# Altium PCB PCB_BoargV1.PcbDoc
Units mm, origin at the board's own origin, x right, y up, seen from the top; angles counter-clockwise.
Board outline 70.99 x 43.56 mm, 2 copper layers (Top Layer, Bottom Layer); 40 components, 55 nets, 199 pads, 16 vias.
Unrouted connection lines stored in the file: 39.
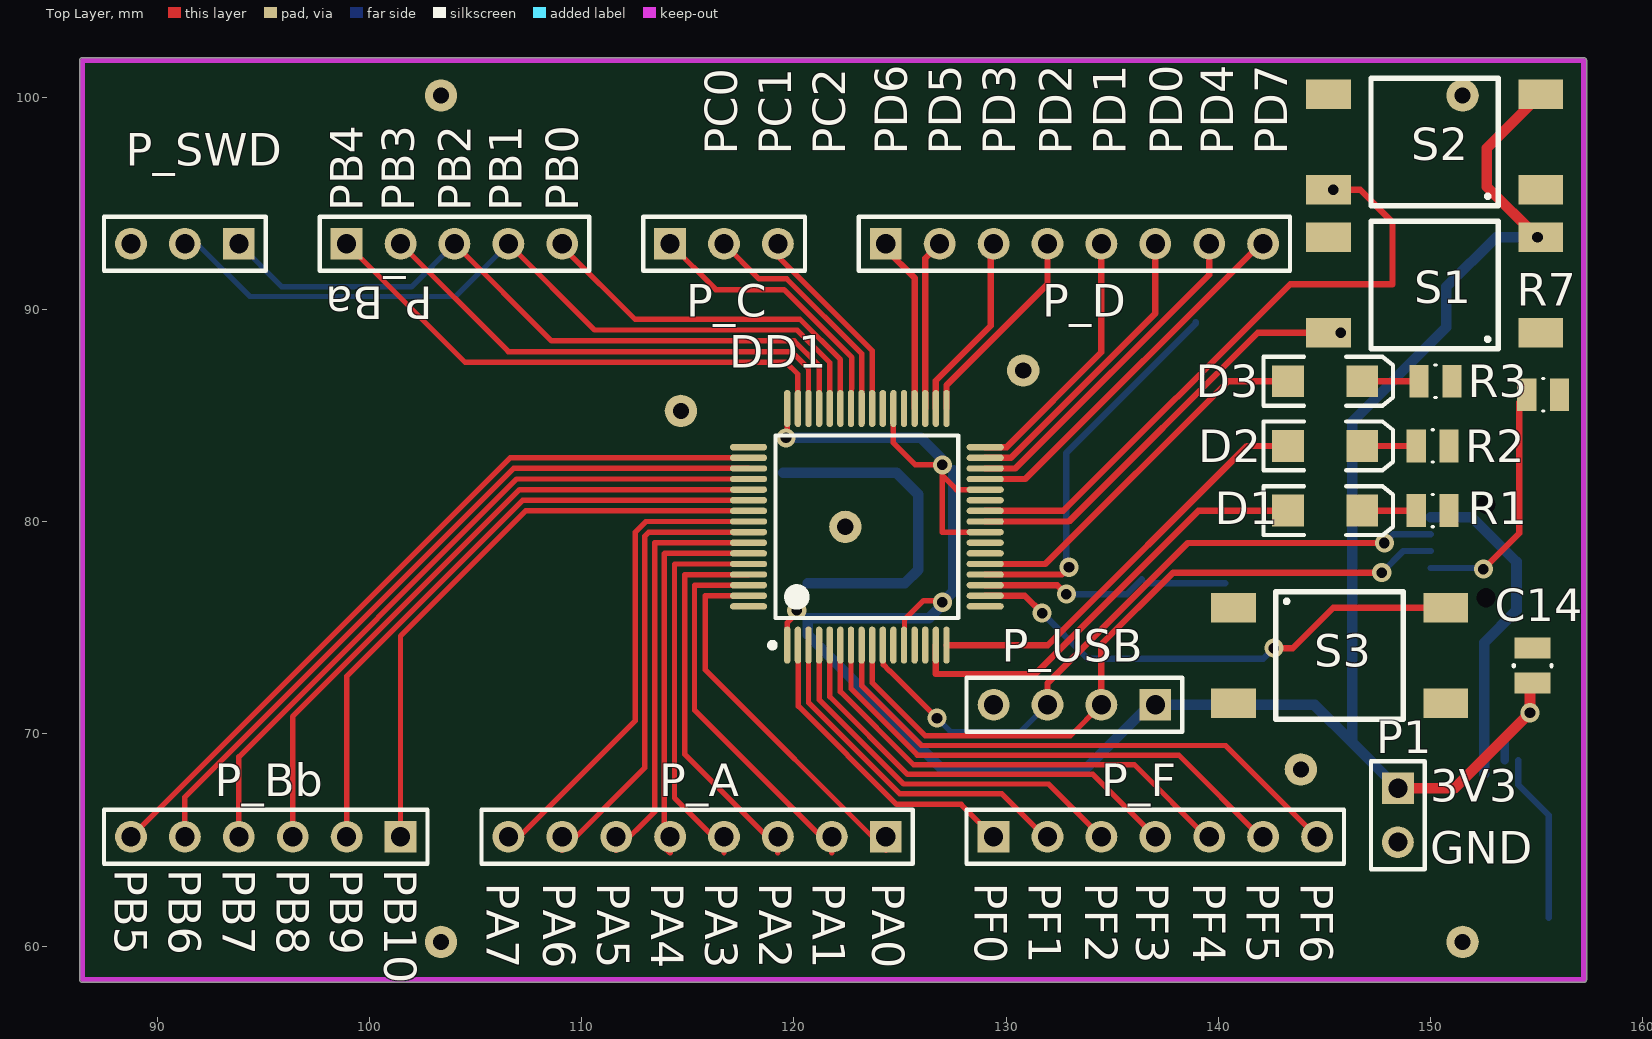
[diagram p0: Top Layer view]
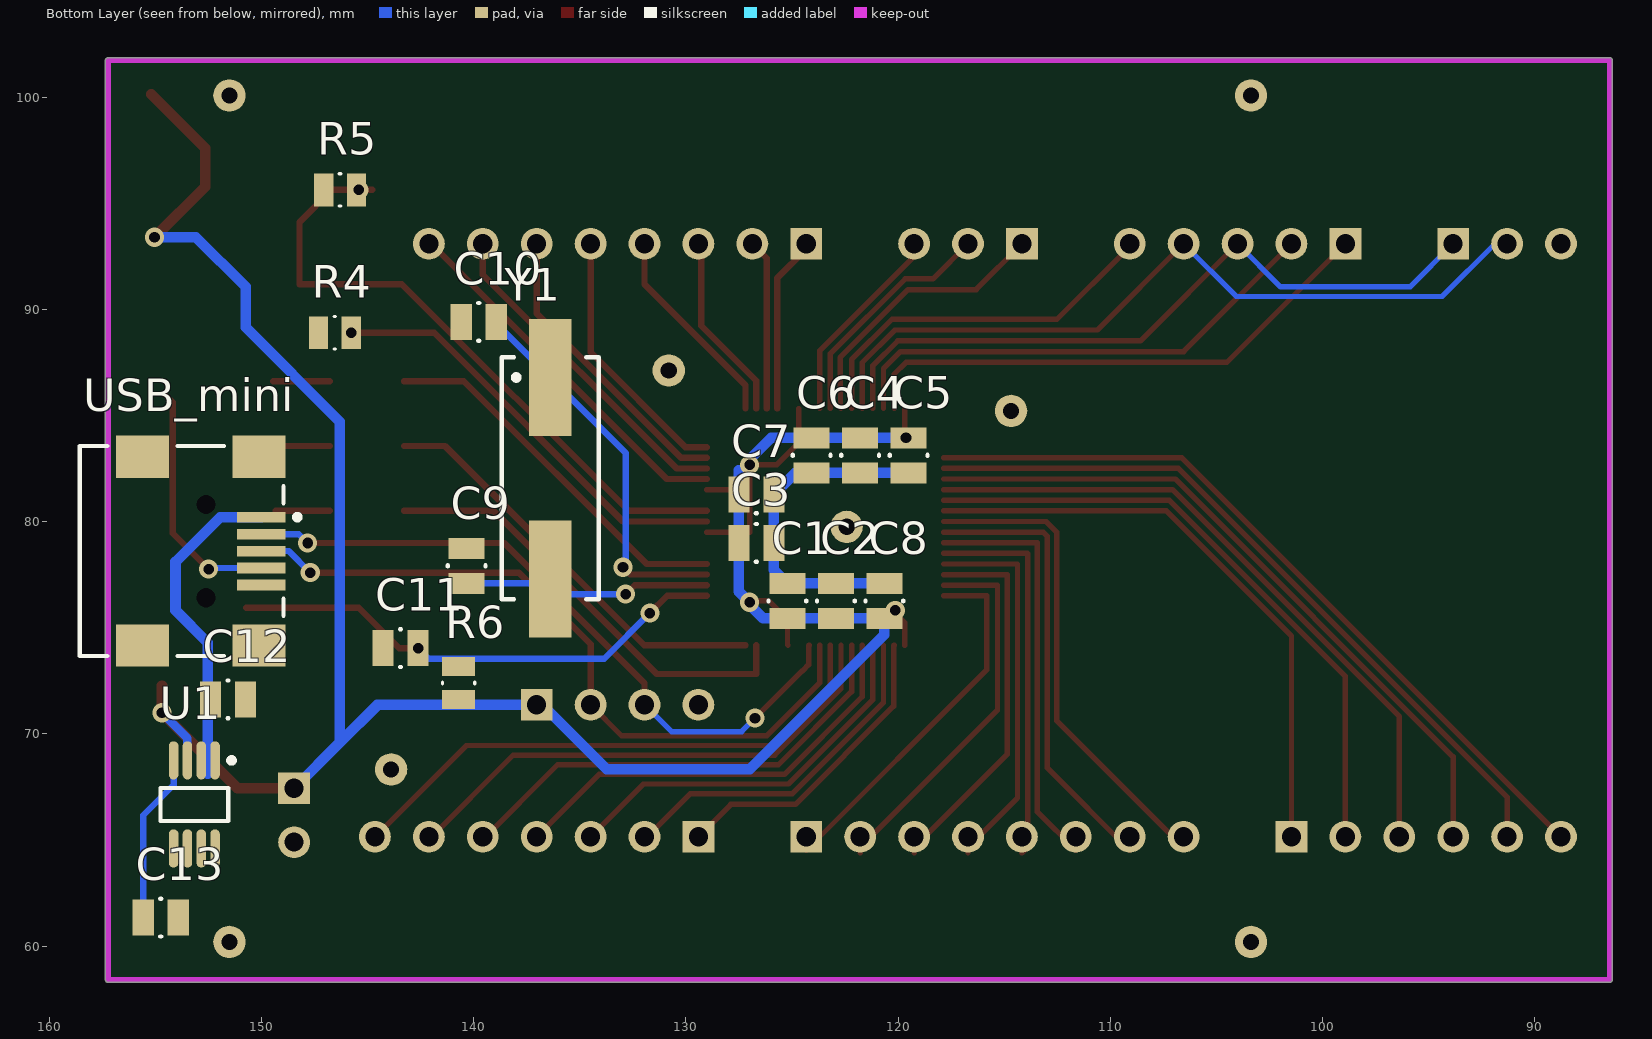
[diagram p1: Bottom Layer view, seen from below]
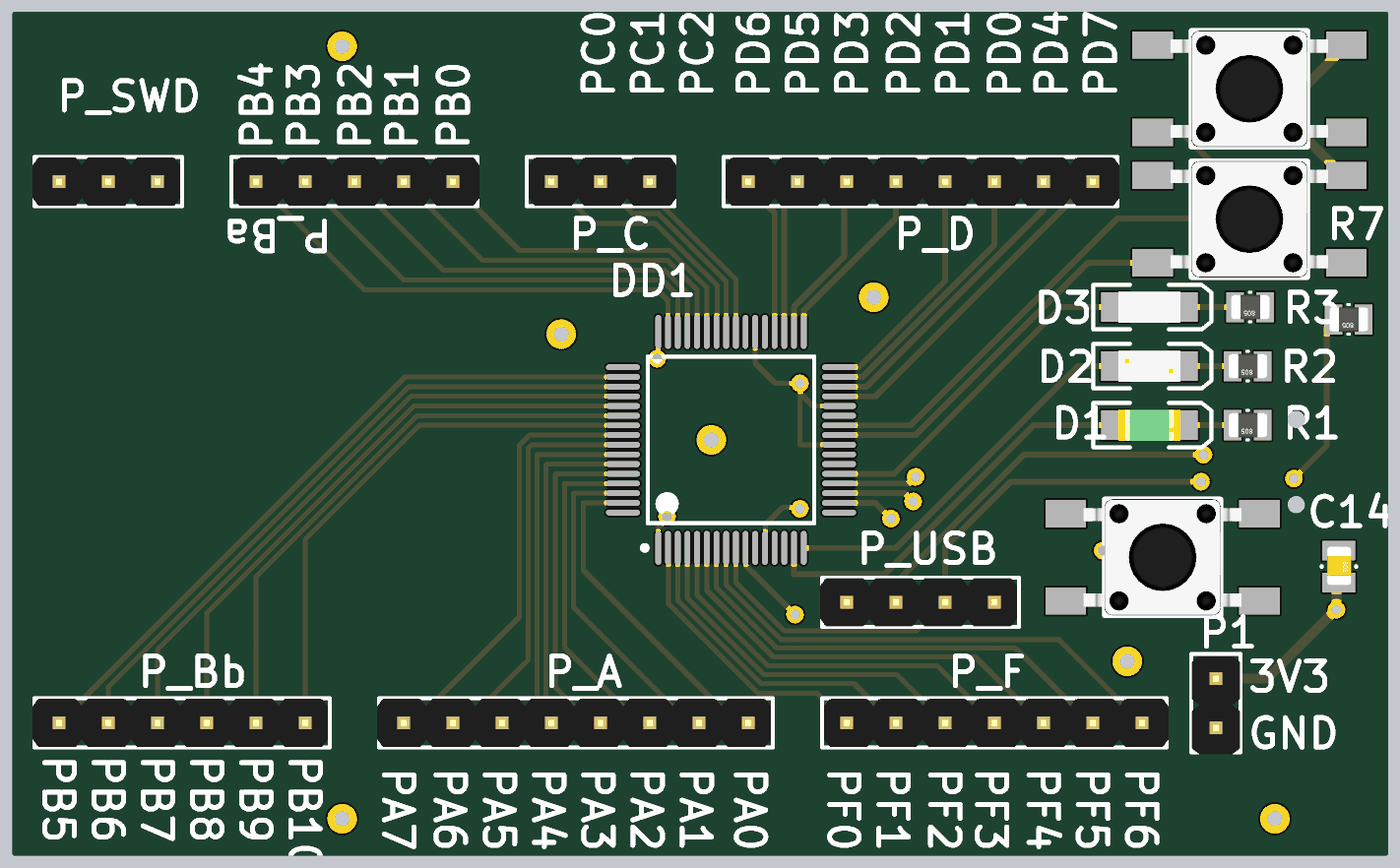
[diagram p2: 3D render of the assembled board from above, using the file's embedded part models]
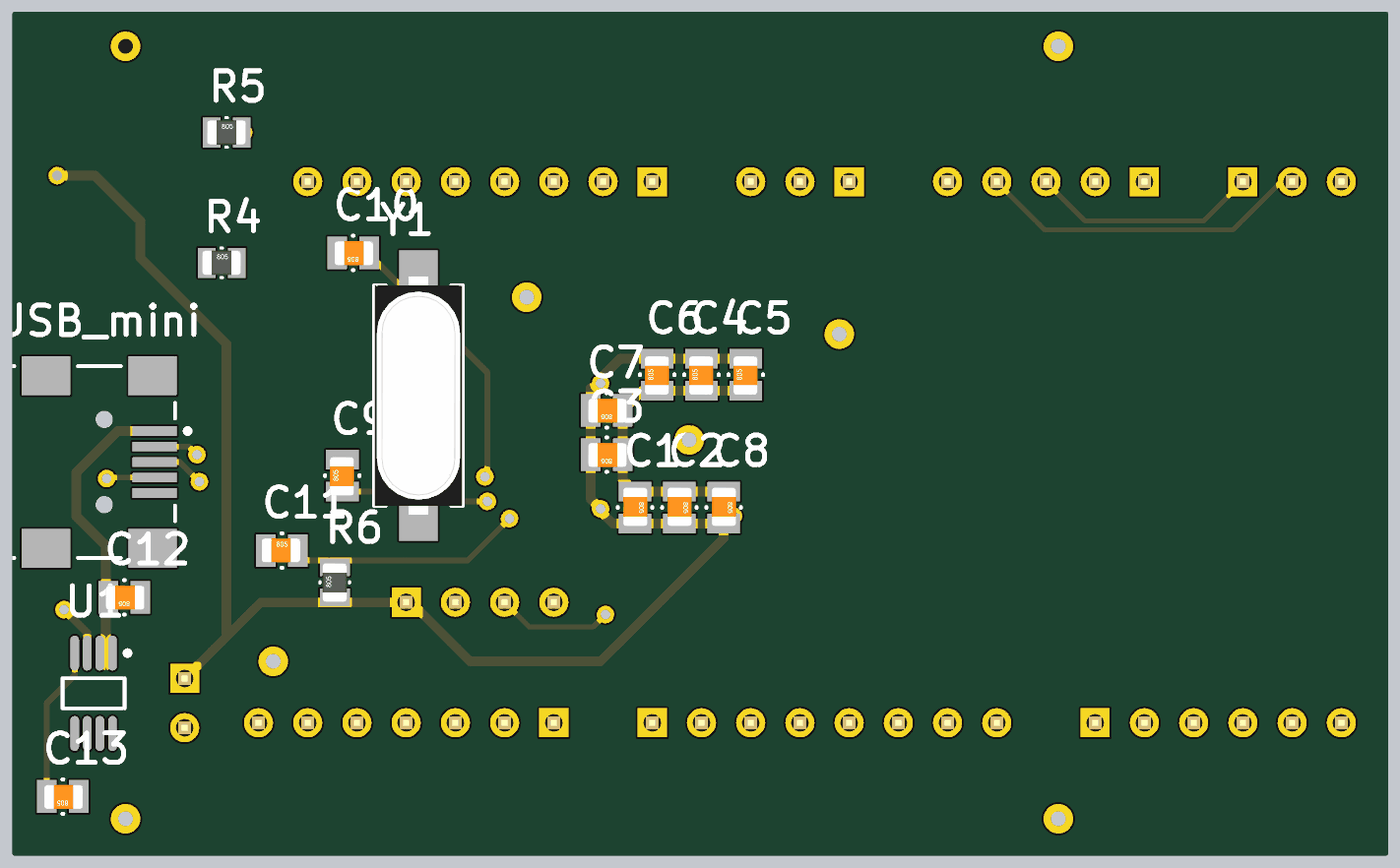
[diagram p3: 3D render of the assembled board from below, using the file's embedded part models]

## Layer stack, top to bottom
Top Solder: solder mask 0.0102, Solder Resist, Dk 3.5
Top Layer: signal copper 0.0356
Dielectric 1: dielectric 0.32, FR-4, Dk 4.8
Bottom Layer: signal copper 0.0356
Bottom Solder: solder mask 0.0102, Solder Resist, Dk 3.5

## Board outline
86.36,58.42 ccw(c86.487,58.42) 86.487,58.293 157.226,58.293 ccw(c157.226,58.42) 157.353,58.42 157.353,101.727 ccw(c157.226,101.727) 157.226,101.854 86.487,101.854 ccw(c86.487,101.727) 86.36,101.727

## Design rules (kind name [scope] priority, off if disabled: settings)
Clearance [All] p1: gap=0.2
PolygonConnect [All] p1: connectstyle=Relief reliefconductorwidth=0.254 reliefentries=4 polygonreliefangle="90 Angle" airgapwidth=0.254
RoutingVias [All] p1: holewidth=0.6 width=1.27 viastyle="Through Hole" minholewidth=0.4 minwidth=0.8 maxholewidth=0.5 maxwidth=0.9
SolderMaskExpansion [All] p1: expansion=0.102
Width Width_3V3 [InNet('3.3V')] p1: maxlimit=0.9 minlimit=0.254 preferedwidth=0.5
Width Width_5V [InNet('5V')] p2: maxlimit=0.9 minlimit=0.254 preferedwidth=0.5
Width Width_GND [InNet('GND')] p3: maxlimit=0.9 minlimit=0.254 preferedwidth=0.5 minimp=50.000000 maximp=50.000000 favimp=50.000000
Width [All] p4: maxlimit=0.6 minlimit=0.254 preferedwidth=0.3
29 further rules are at their usual default settings.

## Components (designator, comment, footprint, x,y, rotation, side; value= is the part's Value field where it differs from the comment)
C1 "CAP" C0805C 125.222,77.089 r270 bottom
C2 "CAP" C0805C 122.936,77.089 r270 bottom
C3 "CAP" C0805C 125.857,78.994 r0 bottom
C4 "CAP" C0805C 121.793,82.296 r90 bottom
C5 "CAP" C0805C 119.507,82.296 r90 bottom
C6 "CAP" C0805C 124.079,82.296 r90 bottom
C7 "CAP" C0805C 125.857,81.28 r0 bottom
C8 "CAP" C0805C 120.65,77.089 r270 bottom
C9 "CAP" C0805C 140.335,77.089 r90 bottom
C10 "CAP" C0805C 138.938,89.408 r0 bottom
C11 "CAP" C0805C 144.272,74.041 r180 bottom
C12 "CAP" C0805C 150.749,71.628 r0 bottom
C13 "CAP" C0805C 153.924,61.341 r0 bottom
C14 "CAP" C0805C 154.813,74.041 r270 top
D1 "LED" LED1206G 145.034,80.518 r0 top
D2 "LED" LED1206R 145.034,83.566 r0 top
D3 "LED" LED1206Y 145.034,86.614 r0 top
DD1 "К1986ВЕ92Q" TSQFP50P1200X1200X160-64N 123.444,79.756 r90 top
P1 "Header 2" HDR1X2 148.463,67.437 r270 top
P_A "Header 8" HDR1X8 124.333,65.151 r180 top
P_Ba "Header 5" HDR1X5 98.933,93.091 r0 top
P_Bb "Header 6" HDR1X6 101.473,65.151 r180 top
P_C "Header 3" HDR1X3 114.173,93.091 r0 top
P_D "Header 8" HDR1X8 124.333,93.091 r0 top
P_F "Header 7" HDR1X7 129.413,65.151 r0 top
P_SWD "Header 3" HDR1X3 93.853,93.091 r180 top
P_USB "Header 4" HDR1X4 137.033,71.374 r180 top
R1 "RES" C0805R 150.876,80.518 r180 top
R2 "RES" C0805R 150.876,83.566 r180 top
R3 "RES" C0805R 151.003,86.614 r180 top
R4 "RES" C0805R 147.32,88.9 r180 bottom
R5 "RES" C0805R 147.066,95.631 r180 bottom
R6 "RES" C0805R 140.716,71.628 r90 bottom
R7 "RES" C0805R 156.083,85.979 r180 top
S1 "SPST-NO" SPST-NO 155.194,88.9 r90 top
S2 "SPST-NO" SPST-NO 155.194,95.631 r90 top
S3 "SPST-NO" SPST-NO 140.716,75.946 r270 top
U1 "ADP1715ARMZ-3.3-R7" ADI-RM-8_N 153.162,66.675 r270 bottom
USB_mini "USB Mini" USB/SM0.8-6H5 157.861,78.613 r0 bottom
Y1 "XTAL" "HC49SMD C" 136.398,82.042 r270 bottom

## Footprints (in the part's own frame and the unit in brackets; to place one, negate y for a bottom-side part, rotate by r counter-clockwise, add the part's x,y. Pads: shape width x height; smd on the part's side, far side on the other; paste and mask are expansions set on the pad)
ADI-RM-8_N [mm] "SOP, 8-Leads, Body 3x3mm, Pitch 0.65mm, IPC Medium Density"
  oval 1.8x0.45 smd: 1(-2.075,0.975) 2(-2.075,0.325) 3(-2.075,-0.325) 4(-2.075,-0.975) 5(2.075,-0.975) 6(2.075,-0.325) 7(2.075,0.325) 8(2.075,0.975)
  silkscreen extent -2.2,-1.6 0.77,1.87, body extent -1.6,-1.6 1.6,1.6, height 1.1
C0805C [mm]
  rect 1x1.7 smd: 1(0,0) 2(1.65,0)
  silkscreen extent 0.8,-0.89 0.85,0.89, body extent -0.21,-0.61 1.79,0.64, height 0.78
C0805R [mm]
  rect 0.9x1.55 smd: 1(0,0) 2(1.55,0)
  silkscreen extent 0.73,-0.76 0.81,0.76, body extent -0.24,-0.62 1.76,0.63, height 0.78
"HC49SMD C" [mm] "Quartz Crystal, SMD thickness C; Body 13.4 (inc. leads) x 4.9 mm (LxW max)"
  rect 5.5x2 smd: 1(-4.75,0) 2(4.75,0)
  silkscreen extent -5.7,-2.29 5.7,2.29, body extent -6.15,-2.25 6.15,2.25, height 3.6
HDR1X2 [mm] "Connector; Header; 2 Position"
  rect 1.5x1.5 hole 0.9: 1(0,0)
  round 1.5 hole 0.9: 2(2.54,0)
  silkscreen extent -1.27,-1.27 3.81,1.27, body extent -1.17,-1.25 3.91,1.25, height 8.2
HDR1X3 [mm] "Connector; Header; 3 Position"
  rect 1.5x1.5 hole 0.9: 1(0,0)
  round 1.5 hole 0.9: 2(2.54,0) 3(5.08,0)
  silkscreen extent -1.27,-1.27 6.35,1.27, body extent -1.17,-1.25 6.45,1.25, height 8.2
HDR1X4 [mm] "Connector; Header; 4 Position"
  rect 1.5x1.5 hole 0.9: 1(0,0)
  round 1.5 hole 0.9: 2(2.54,0) 3(5.08,0) 4(7.62,0)
  silkscreen extent -1.27,-1.27 8.89,1.27, body extent -1.17,-1.25 8.99,1.25, height 8.2
HDR1X5 [mm] "Connector; Header; 5 Position"
  rect 1.5x1.5 hole 0.9: 1(0,0)
  round 1.5 hole 0.9: 2(2.54,0) 3(5.08,0) 4(7.62,0) 5(10.16,0)
  silkscreen extent -1.27,-1.27 11.43,1.27, body extent -1.17,-1.25 11.53,1.25, height 8.2
HDR1X6 [mm] "Connector; Header; 6 Position"
  rect 1.5x1.5 hole 0.9: 1(0,0)
  round 1.5 hole 0.9: 2(2.54,0) 3(5.08,0) 4(7.62,0) 5(10.16,0) 6(12.7,0)
  silkscreen extent -1.27,-1.27 13.97,1.27, body extent -1.17,-1.25 14.07,1.25, height 8.2
HDR1X7 [mm] "Connector; Header; 7 Position"
  rect 1.5x1.5 hole 0.9: 1(0,0)
  round 1.5 hole 0.9: 2(2.54,0) 3(5.08,0) 4(7.62,0) 5(10.16,0) 6(12.7,0) 7(15.24,0)
  silkscreen extent -1.27,-1.27 16.51,1.27, body extent -1.17,-1.25 16.61,1.25, height 8.2
HDR1X8 [mm] "Connector; Header; 8 Position"
  rect 1.5x1.5 hole 0.9: 1(0,0)
  round 1.5 hole 0.9: 2(2.54,0) 3(5.08,0) 4(7.62,0) 5(10.16,0) 6(12.7,0) 7(15.24,0) 8(17.78,0)
  silkscreen extent -1.27,-1.27 19.05,1.27, body extent -1.17,-1.25 19.15,1.25, height 8.2
LED1206G [mm] "SMT LED; 2 Flat Leads; 3.2X1.6X1.1"
  rect 1.5x1.5 smd: 1(-1.75,0) 2(1.75,0)
  silkscreen extent -2.9,-1.15 3.2,1.15, body extent -1.6,-0.8 1.6,0.8, height 1.11
LED1206R [mm] "SMT LED; 2 Flat Leads; 3.2X1.6X1.1"
  rect 1.5x1.5 smd: 1(-1.75,0) 2(1.75,0)
  silkscreen extent -2.9,-1.15 3.2,1.15, body extent -1.6,-0.8 1.6,0.8, height 1.11
LED1206Y [mm] "SMT LED; 2 Flat Leads; 3.2X1.6X1.1"
  rect 1.5x1.5 smd: 1(-1.75,0) 2(1.75,0)
  silkscreen extent -2.9,-1.15 3.2,1.15, body extent -1.6,-0.8 1.6,0.8, height 1.11
SPST-NO [mm] "Tactile Switch SPST-NO 6x6mm"
  rect 1.4x2.1 smd: 1(0,0) 2(4.5,0) 3(4.5,10) 4(0,10)
  silkscreen extent -0.75,2 5.25,8, body extent -0.75,0.93 5.25,9.08, height 5
TSQFP50P1200X1200X160-64N [mm] "TSQFP, 64-Leads, Body 10,00x10,00mm, Pitch 0,50mm, IPC Medium Density"
  oval 1.75x0.3 smd: 1(-5.575,3.75) 2(-5.575,3.25) 3(-5.575,2.75) 4(-5.575,2.25) 5(-5.575,1.75) 6(-5.575,1.25) 7(-5.575,0.75) 8(-5.575,0.25) 9(-5.575,-0.25) 10(-5.575,-0.75) 11(-5.575,-1.25) 12(-5.575,-1.75) 13(-5.575,-2.25) 14(-5.575,-2.75) 15(-5.575,-3.25) 16(-5.575,-3.75) 33(5.575,-3.75) 34(5.575,-3.25) 35(5.575,-2.75) 36(5.575,-2.25) 37(5.575,-1.75) 38(5.575,-1.25) 39(5.575,-0.75) 40(5.575,-0.25) 41(5.575,0.25) 42(5.575,0.75) 43(5.575,1.25) 44(5.575,1.75) 45(5.575,2.25) 46(5.575,2.75) 47(5.575,3.25) 48(5.575,3.75)
  oval 0.3x1.75 smd: 17(-3.75,-5.575) 18(-3.25,-5.575) 19(-2.75,-5.575) 20(-2.25,-5.575) 21(-1.75,-5.575) 22(-1.25,-5.575) 23(-0.75,-5.575) 24(-0.25,-5.575) 25(0.25,-5.575) 26(0.75,-5.575) 27(1.25,-5.575) 28(1.75,-5.575) 29(2.25,-5.575) 30(2.75,-5.575) 31(3.25,-5.575) 32(3.75,-5.575) 49(3.75,5.575) 50(3.25,5.575) 51(2.75,5.575) 52(2.25,5.575) 53(1.75,5.575) 54(1.25,5.575) 55(0.75,5.575) 56(0.25,5.575) 57(-0.25,5.575) 58(-0.75,5.575) 59(-1.25,5.575) 60(-1.75,5.575) 61(-2.25,5.575) 62(-2.75,5.575) 63(-3.25,5.575) 64(-3.75,5.575)
  silkscreen extent -5.7,-4.3 4.3,4.57, body extent -5,-5 5,5, height 1.6
USB/SM0.8-6H5 [mm] "Connector; USB2.0, Type B, SM; 5 Position; Right Angle"
  rect 2.3x0.5 smd: 1(-7.85,-1.6) 2(-7.85,-0.8) 3(-7.85,0) 4(-7.85,0.8) 5(-7.85,1.6)
  rect 2.5x2 smd: 6(-7.75,4.45) 7(-2.25,4.45) 8(-7.75,-4.45) 9(-2.25,-4.45)
  round 0.6 hole 0.9 unplated: MH1(-5.25,2.2) MH2(-5.25,-2.2)
  silkscreen extent -9.67,-4.95 0.7,4.95, body extent -8.9,-4.95 0.7,4.95, height 3.9

## Part data
C1 C2 C3 C4 C5 C6 C7 C8 C9 C10 C11 C12 C13 C14: "Capacitor"
D1 D2 D3: "Typical LED"
P1: "Header, 2-Pin"
P_A P_D: "Header, 8-Pin"
P_Ba: "Header, 5-Pin"
P_Bb: "Header, 6-Pin"
P_C P_SWD: "Header, 3-Pin"
P_F: "Header, 7-Pin"
P_USB: "Header, 4-Pin"
R1 R2 R3 R4 R5 R6 R7: "Resistor"
S1 S2 S3: "Tactile Switch 7.3mm, SMD"
U1: "500 mA, Low Dropout, CMOS Linear Regulator, 2.5 to 5.5 V Vin, 3.3 V Vout, Industrial, 8-pin SOP (RM-8), Reel"
Y1: "Crystal Oscillator"

## Free pads (board coordinates)
  round 1.524 hole 0.762: 0(103.378,100.076) 1(103.378,60.198) 2(151.511,100.076) 3(151.511,60.198) 4(130.81,87.122) 5(114.681,85.217) 6(143.891,68.326) 7(122.428,79.756)

## Via types
v1: diameter 0.9, hole 0.5, Top Layer to Bottom Layer, 16 vias

## Nets (pads, with @x,y where several pads share a name; then routed paths per layer and width w, separated by ;. In a path a pad name is that pad's centre, name@x,y a point inside that pad or via, vN(x,y) a via of type N, cw(c..) or ccw(c..) an arc to the next point about the centre after c; other vN are vias at no path point)
3.3V: C1.2 C2.2 C3.2 C4.2 C5.2 C6.2 C7.2 C8.2 C14.2 DD1.1 DD1.12 DD1.24 DD1.28 DD1.38 DD1.48 P1.1 P_USB.1 R6.1 S1.2 S2.2 U1.3 | length 123
  Top Layer w0.254: v1(119.634,83.947) 119.694,84.007 DD1.48 ; DD1.1 119.694,75.244 120.142,75.692 v1(120.142,75.819) ; DD1.38 124.694,83.713 125.73,82.677 v1(127,82.677) 127,82.169 ; DD1.12 125.217,74.204 125.217,75.383 126.111,76.277 126.923,76.277 v1(127,76.2) ; DD1.24 127,79.506 127,82.169 ; DD1.28 127.663,81.506 127,82.169
  Top Layer w0.5: P1.1 151.13,67.437 v1(154.686,70.993) C14.2@154.686,72.264 ; v1(155.039,93.4) 152.654,95.785 152.654,97.591 S2.2
  Bottom Layer w0.254: v1(119.634,83.947) v1(119.634,83.947) ; v1(120.142,75.819) C8.2@120.27,75.819 ; v1@127,76.073 v1(127,76.2) ; v1(127,82.677) v1@127,82.931
  Bottom Layer w0.4: U1.3 153.487,69.794 v1(154.686,70.993)
  Bottom Layer w0.5: v1(119.634,83.947) C4.2 C6.2 125.985,83.946 v1@127,82.931 ; v1@127,76.073 126.366,75.439 C1.2 C2.2 C8.2 120.65,74.676 127,68.326 133.731,68.326 136.779,71.374 136.79,71.363 141.089,71.363 144.537,71.363 146.304,69.596 ; v1(127,76.2) 127.507,76.707 C3.2 C7.2 127.507,82.424 ; P1.1 146.304,69.596 ; v1(155.039,93.4) 153.09,93.4 150.749,91.059 150.749,89.154 146.304,84.709 146.304,69.596
5V: C12.2 U1.1 U1.2 USB_mini.1 | length 15.5
  Bottom Layer w0.5: USB_mini.1 151.938,80.213 154.046,78.105 154.051,78.105 154.051,75.819 152.527,74.295 152.527,68.115
GND: C1.1 C2.1 C3.1 C4.1 C5.1 C6.1 C7.1 C8.1 C9.2 C10.2 C11.1 C12.1 C13.1 C14.1 DD1.11 DD1.23 DD1.27 DD1.39 DD1.49 DD1.64 P1.2 P_SWD.3 P_USB.4 pad.0 pad.1 pad.2 pad.3 pad.4 pad.5 pad.6 pad.7 R1.1 R2.1 R3.1 R4.1 R5.1 R7.1 S3.2 U1.5 U1.6 U1.7 U1.8 USB_mini.5 USB_mini.6 USB_mini.7 USB_mini.8 USB_mini.9 | length 15.8
  Bottom Layer w0.5: C5.1 124.841,82.296 C7.1 125.857,77.724 C1.1 C8.1
NetC9_1: C9.1 DD1.19 Y1.2 | length 11.6
  Top Layer w0.3: DD1.19 132.417,77.006 v1(132.842,76.581)
  Bottom Layer w0.3: v1(132.842,76.581) 135.687,76.581 Y1.2 ; Y1.2@136.601,77.089 C9.1
NetC10_1: C10.1 DD1.20 Y1.1 | length 18.4
  Top Layer w0.3: DD1.20 132.624,77.506 v1(132.969,77.851)
  Bottom Layer w0.3: v1@132.842,77.597 132.842,83.236 Y1.1 138.938,89.332 C10.1
NetC13_2: C13.2 U1.4 | length 8
  Bottom Layer w0.3: U1.4 154.137,67.605 155.575,66.167 C13.2
NetD1_1: D1.1 DD1.15 | length 21.1
  Top Layer w0.3: DD1.15 126.694,72.823 131.37,72.823 139.065,80.518 D1.1
NetD1_2: D1.2 R1.2 | length 2.5
  Top Layer w0.3: D1.2 R1.2
NetD2_1: D2.1 DD1.16 | length 20
  Top Layer w0.3: DD1.16 131.966,74.181 141.351,83.566 D2.1
NetD2_2: D2.2 R2.2 | length 2.5
  Top Layer w0.3: D2.2 R2.2
NetD3_1: D3.1 DD1.21 | length 17.8
  Top Layer w0.3: DD1.21 131.854,78.006 140.462,86.614 D3.1
NetD3_2: D3.2 R3.2 | length 2.7
  Top Layer w0.3: D3.2 R3.2
NetDD1_2: DD1.2 P_F.1 | length 14.6
  Top Layer w0.254: DD1.2 120.217,74.158 120.217,71.306 124.848,66.675 127.889,66.675 P_F.1
NetDD1_3: DD1.3 P_F.2 | length 16.6
  Top Layer w0.254: DD1.3 120.694,71.471 124.982,67.183 129.794,67.183 P_F.2@131.953,65.024
NetDD1_4: DD1.4 P_F.3 | length 18.5
  Top Layer w0.254: DD1.4 121.194,71.613 125.17,67.637 132.007,67.637 P_F.3
NetDD1_5: DD1.5 P_F.4 | length 20.5
  Top Layer w0.254: DD1.5 121.694,71.755 125.358,68.091 134.093,68.091 P_F.4
NetDD1_6: DD1.6 P_F.5 | length 22.5
  Top Layer w0.254: DD1.6 122.194,71.989 125.638,68.545 136.052,68.545 P_F.5@139.573,65.024
NetDD1_7: DD1.7 P_F.6 | length 24.4
  Top Layer w0.254: DD1.7 122.694,72.131 125.826,68.999 138.138,68.999 P_F.6@142.113,65.024
NetDD1_8: DD1.8 P_F.7 | length 26.3
  Top Layer w0.254: DD1.8 123.194,72.273 126.014,69.453 140.351,69.453 P_F.7
NetDD1_9: DD1.9 P_USB.2 USB_mini.3 | length 34.4
  Top Layer w0.254: DD1.9 123.694,72.415 126.202,69.907 133.026,69.907 P_USB.2
  Top Layer w0.3: P_USB.2 134.493,74.223 137.867,77.597 v1(147.701,77.597)
  Bottom Layer w0.3: v1(147.701,77.597) 148.717,78.613 USB_mini.3
NetDD1_10: DD1.10 P_USB.3 USB_mini.2 | length 32.5
  Top Layer w0.254: DD1.10 124.217,74.158 124.217,73.258 124.496,72.979 124.506,72.979 v1(126.746,70.739)
  Top Layer w0.3: P_USB.3@131.699,71.374 131.953,71.628 131.953,72.39 138.557,78.994 v1(147.828,78.994)
  Bottom Layer w0.254: v1(126.746,70.739) 127.381,70.104 130.683,70.104 131.699,71.12 P_USB.3@131.699,71.374
  Bottom Layer w0.3: v1(147.828,78.994) 148.247,79.413 USB_mini.2
NetDD1_25: DD1.25 R4.2 S1.4 | length 20.4
  Top Layer w0.3: DD1.25 132.965,80.006 141.859,88.9 S1.4 v1(145.77,88.9)
NetDD1_26: DD1.26 R5.2 S2.4 | length 30.7
  Top Layer w0.3: DD1.26 132.703,80.506 143.383,91.186 148.209,91.186 148.209,94.107 146.685,95.631 v1(145.415,95.631) S2.4 S2.4@144.78,95.631
  Bottom Layer w0.3: v1(145.415,95.631) R5.2
NetDD1_29: DD1.29 P_D.8 | length 18
  Top Layer w0.3: DD1.29 130.901,82.006 142.113,93.218 P_D.8@142.113,93.472
NetDD1_30: DD1.30 P_D.7 | length 15.8
  Top Layer w0.3: DD1.30 130.44,82.506 139.573,91.639 P_D.7
NetDD1_31: DD1.31 P_D.6 | length 14.1
  Top Layer w0.3: DD1.31 130.233,83.006 137.033,89.806 P_D.6
NetDD1_32: DD1.32 P_D.5 | length 12.4
  Top Layer w0.3: DD1.32 130.026,83.506 134.493,87.973 P_D.5
NetDD1_33: DD1.33 P_D.4 | length 9.7
  Top Layer w0.3: DD1.33 127.194,86.427 131.953,91.186 P_D.4
NetDD1_34: DD1.34 P_D.3 | length 8.7
  Top Layer w0.3: DD1.34 126.694,86.634 129.286,89.226 P_D.3@129.286,92.964
NetDD1_35: DD1.35 P_D.2 | length 8
  Top Layer w0.3: DD1.35 126.194,92.412 P_D.2
NetDD1_36: DD1.36 P_D.1 | length 8.3
  Top Layer w0.3: P_D.1 124.333,92.837 125.694,91.476 DD1.36
NetDD1_40: DD1.40 P_C.3 | length 9.6
  Top Layer w0.254: P_C.3 119.253,92.498 123.694,88.057 DD1.40
NetDD1_41: DD1.41 P_C.2 | length 11.2
  Top Layer w0.254: P_C.2 118.364,91.44 119.669,91.44 123.194,87.915 DD1.41
NetDD1_42: DD1.42 P_C.1 | length 13.2
  Top Layer w0.254: P_C.1 116.332,90.932 119.535,90.932 122.74,87.727 122.74,86.277 122.717,86.254 122.717,85.354 DD1.42
NetDD1_43: DD1.43 P_Ba.5 | length 17.7
  Top Layer w0.254: P_Ba.5@109.274,93.091 109.274,92.783 112.522,89.535 120.29,89.535 122.194,87.631 DD1.43
NetDD1_44: DD1.44 P_Ba.4 P_SWD.2 | length 36.9
  Top Layer w0.254: P_Ba.4 110.617,89.027 120.156,89.027 121.694,87.489 DD1.44
  Bottom Layer w0.254: P_SWD.2 91.891,93.091 94.377,90.605 104.067,90.605 P_Ba.4
NetDD1_45: DD1.45 P_Ba.3 P_SWD.1 | length 33.4
  Top Layer w0.254: P_Ba.3 108.585,88.519 120.022,88.519 121.194,87.347 DD1.45
  Bottom Layer w0.254: P_SWD.1 95.885,91.059 101.981,91.059 P_Ba.3
NetDD1_46: DD1.46 P_Ba.2 | length 23.5
  Top Layer w0.254: P_Ba.2 106.553,88.011 119.888,88.011 120.694,87.205 DD1.46
NetDD1_47: DD1.47 P_Ba.1 | length 25.4
  Top Layer w0.254: P_Ba.1 104.521,87.503 119.634,87.503 120.194,86.943 DD1.47
NetDD1_50: DD1.50 P_Bb.6 | length 36.5
  Top Layer w0.254: P_Bb.6 106.628,83.006 DD1.50
NetDD1_51: DD1.51 P_Bb.5 | length 34.8
  Top Layer w0.254: P_Bb.5 91.313,67.016 106.803,82.506 DD1.51
NetDD1_52: DD1.52 P_Bb.4 | length 33.2
  Top Layer w0.254: P_Bb.4 93.853,68.914 106.945,82.006 DD1.52
NetDD1_53: DD1.53 P_Bb.3 | length 31.6
  Top Layer w0.254: P_Bb.3 96.393,70.812 107.087,81.506 DD1.53
NetDD1_54: DD1.54 P_Bb.2 | length 29.9
  Top Layer w0.254: P_Bb.2 98.933,72.71 107.229,81.006 DD1.54
NetDD1_55: DD1.55 P_Bb.1 | length 28.3
  Top Layer w0.254: P_Bb.1 101.473,74.608 107.371,80.506 DD1.55
NetDD1_56: DD1.56 P_A.8 | length 22.9
  Top Layer w0.254: P_A.8@106.553,64.643 112.522,70.612 112.522,79.495 113.033,80.006 DD1.56
NetDD1_57: DD1.57 P_A.7 | length 21.4
  Top Layer w0.254: P_A.7@109.093,64.516 112.976,68.399 112.976,79.307 113.175,79.506 DD1.57
NetDD1_58: DD1.58 P_A.6 | length 19.7
  Top Layer w0.254: P_A.6@111.633,64.516 113.442,66.325 113.442,79.006 DD1.58
NetDD1_59: DD1.59 P_A.5 | length 18.2
  Top Layer w0.254: 114.173,64.389 113.896,64.666 113.896,78.486 113.916,78.506 DD1.59
NetDD1_60: DD1.60 P_A.4 | length 18.1
  Top Layer w0.254: 116.713,64.389 116.713,64.643 114.378,66.978 114.378,78.006 DD1.60
NetDD1_61: DD1.61 P_A.3 | length 17.9
  Top Layer w0.254: DD1.61 114.868,77.506 114.868,69.028 119.253,64.643 119.253,64.389
NetDD1_62: DD1.62 P_A.2 | length 17.8
  Top Layer w0.254: DD1.62 115.322,77.006 115.322,71.114 121.793,64.643 121.793,64.389
NetDD1_63: DD1.63 P_A.1 | length 17.6
  Top Layer w0.254: DD1.63 115.824,76.506 115.824,73.025 P_A.1@124.333,64.516
NetR7_2: R7.2 USB_mini.4 | length 11.6
  Top Layer w0.3: v1(152.489,77.762) 154.178,79.451 154.178,85.624 R7.2
  Bottom Layer w0.3: USB_mini.4 152.489,77.813 v1(152.489,77.762)
RESET: C11.2 DD1.18 R6.2 S3.4 | length 23.9
  Top Layer w0.3: DD1.18 130.885,76.506 v1(131.699,75.692) ; v1(142.622,74.041) 143.51,74.041 145.415,75.946 S3.4
  Bottom Layer w0.3: v1(131.699,75.692) 133.858,73.533 142.114,73.533 v1(142.622,74.041)
pads on no net: DD1.13 DD1.14 DD1.17 DD1.22 DD1.37 S1.1 S1.3 S2.1 S2.3 S3.1 S3.3 USB_mini.MH1 USB_mini.MH2

## Keep-outs
Keep-Out Layer:
  lines w0.254: 86.487,58.42 157.226,58.42 157.226,101.727 86.487,101.727 86.487,58.42

## Silkscreen, mask and mechanical layers (free items; w line width, h text height)
Top Overlay:
  text "PC0" at 117.348,97.282 h1.52 r90
  text "PC1" at 119.888,97.282 h1.52 r90
  text "PC2" at 122.428,97.282 h1.52 r90
  text "PD6" at 125.349,97.282 h1.52 r90
  text "PD5" at 127.889,97.282 h1.52 r90
  text "PD3" at 130.429,97.282 h1.52 r90
  text "PD2" at 133.096,97.282 h1.52 r90
  text "PD1" at 135.636,97.282 h1.52 r90
  text "PD0" at 138.303,97.282 h1.52 r90
  text "PD4" at 140.716,97.282 h1.52 r90
  text "PD7" at 143.256,97.282 h1.52 r90
  text "PB4" at 99.695,94.615 h1.52 r90
  text "PB3" at 102.108,94.615 h1.52 r90
  text "PB2" at 104.775,94.615 h1.52 r90
  text "PB1" at 107.188,94.615 h1.52 r90
  text "PB0" at 109.855,94.615 h1.52 r90
  text "3V3" at 149.987,66.802 h1.52
  text "GND" at 149.987,63.881 h1.52
  text "PB5" at 88.011,63.627 h1.52 r270
  text "PB6" at 90.551,63.627 h1.52 r270
  text "PB7" at 93.091,63.627 h1.52 r270
  text "PB8" at 95.631,63.627 h1.52 r270
  text "PB9" at 98.171,63.627 h1.52 r270
  text "PB10" at 100.711,63.627 h1.52 r270
  text "PA7" at 105.537,62.992 h1.52 r270
  text "PA6" at 108.204,62.992 h1.52 r270
  text "PA5" at 110.744,62.992 h1.52 r270
  text "PA4" at 113.284,62.992 h1.52 r270
  text "PA3" at 115.824,62.992 h1.52 r270
  text "PA2" at 118.364,62.992 h1.52 r270
  text "PA1" at 120.904,62.992 h1.52 r270
  text "PA0" at 123.698,62.992 h1.52 r270
  text "PF0" at 128.524,62.992 h1.52 r270
  text "PF1" at 131.064,62.992 h1.52 r270
  text "PF2" at 133.731,62.992 h1.52 r270
  text "PF3" at 136.144,62.992 h1.52 r270
  text "PF4" at 138.811,62.992 h1.52 r270
  text "PF5" at 141.351,62.992 h1.52 r270
  text "PF6" at 143.891,62.992 h1.52 r270

## Dimensions
88.773,65.151 to 88.773,93.091 on Keep-Out Layer
98.933,93.091 to 93.853,93.091 on Keep-Out Layer
114.173,93.091 to 109.093,93.091 on Keep-Out Layer
101.473,65.151 to 106.553,65.151 on Keep-Out Layer
124.333,93.091 to 119.253,93.091 on Keep-Out Layer
124.333,65.151 to 129.413,65.151 on Keep-Out Layer
129.413,65.151 to 131.953,65.151 on Keep-Out Layer
157.226,58.42 to 86.487,58.42 on Keep-Out Layer
157.226,101.727 to 157.226,58.42 on Keep-Out Layer

## Text inside footprints (layer, text, board x,y; h text height)
USB_mini: Mechanical 1 "PCB Edge" at 158.293,82.649 h0.25 r90